# EAGLE board krokomerSTMa (EAGLE 9.6.2)
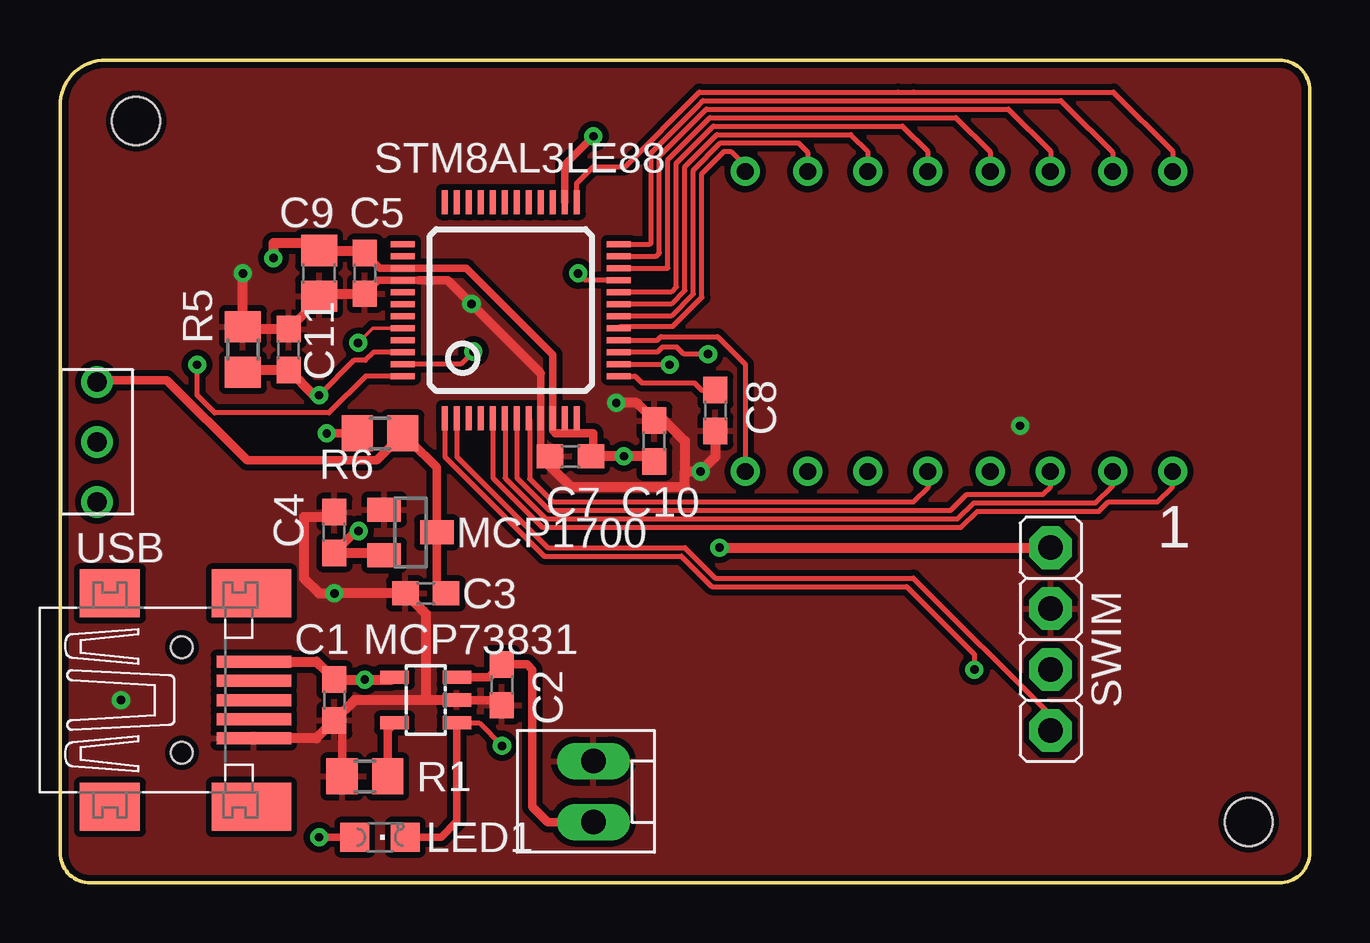
[diagram p0: board, top side]
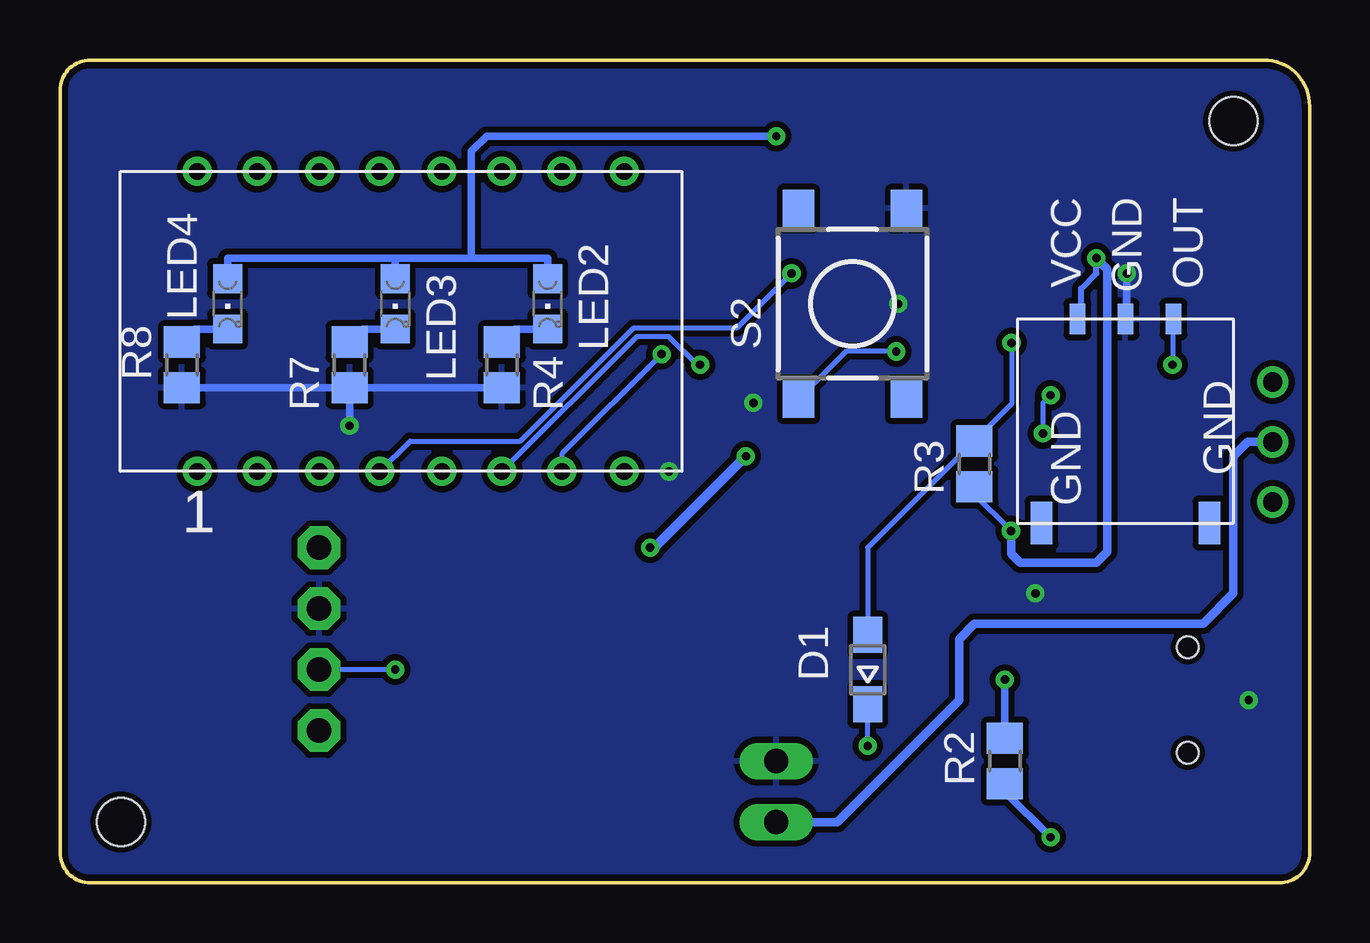
[diagram p1: board, bottom side, seen from below]

Size 52.07 x 34.29 mm. Coordinates in mm from the lower left corner, seen from the top.
Outline: 50.8,0 arc90 52.07,1.27 52.07,33.02 arc90 50.8,34.29 1.91,34.29 arc90 0,32.38 0,1.27 arc90 1.27,0 50.8,0
Copper layers (1*16): Top 0.035mm / dielectric 1.5mm / Bottom 0.035mm
Design rules "default *": minimum track width 5mil, minimum drill 0.3mm, track to track 6mil, track to pad 0.2mm, pad to pad 6mil, via to via 10mil, smd to smd 6mil, copper to edge 0.2mm, drill to drill 0.2mm, minimum pad ring 10mil, minimum via ring 8mil, stop-mask expansion 4mil, vias tented up to drill 0mil, thermal gap 10mil
Holes 2 mm at 49.53,2.54 3.17,31.75

## Footprints (pad centres in the part's own frame; a part is rotated, then mirrored left to right if it is on the bottom)
PSH02-02P = drill 1.016 pad 1.422 long: 1 -1.27,0; 2 1.27,0
C0603 = smd 1.1 x 1: 1 -0.85,0; 2 0.85,0
C0805 = smd 1.3 x 1.5: 1 -0.95,0; 2 0.95,0
SOD323-W = smd 1.5 x 1.2: A 1.45,0; C -1.45,0
CHIPLED_0805 = smd 1.2 x 1.2: A 0,-1.05; C 0,1.05
SOT23 = smd 1 x 1.4: 1 -0.95,-1.1; 2 0.95,-1.1; 3 0,1.1
SOT23-5L = smd 0.55 x 1.2: 1 -0.95,-1.3; 2 0,-1.3; 3 0.95,-1.3; 4 0.95,1.3; 5 -0.95,1.3
R0805 = smd 1.3 x 1.5: 1 -0.95,0; 2 0.95,0
PREPINAC = drill 0.8: 1 0,1; 2 2.5,1; 3 5,1
DTSM-6 = smd 1.55 x 1.3: 1 -3.975,2.25; 2 3.975,2.25; 3 -3.975,-2.25; 4 3.975,-2.25
TQFP48 = smd 0.25 x 1: 1 -2.75,-4.5; 2 -2.25,-4.5; 3 -1.75,-4.5; 4 -1.25,-4.5; 5 -0.75,-4.5; 6 -0.25,-4.5; 7 0.25,-4.5; 8 0.75,-4.5; 9 1.25,-4.5; 10 1.75,-4.5; 11 2.25,-4.5; 12 2.75,-4.5; 25 2.75,4.5; 26 2.25,4.5; 27 1.75,4.5; 28 1.25,4.5; 29 0.75,4.5; 30 0.25,4.5; 31 -0.25,4.5; 32 -0.75,4.5; 33 -1.25,4.5; 34 -1.75,4.5; 35 -2.25,4.5; 36 -2.75,4.5 | smd 1 x 0.25: 13 4.5,-2.75; 14 4.5,-2.25; 15 4.5,-1.75; 16 4.5,-1.25; 17 4.5,-0.75; 18 4.5,-0.25; 19 4.5,0.25; 20 4.5,0.75; 21 4.5,1.25; 22 4.5,1.75; 23 4.5,2.25; 24 4.5,2.75; 37 -4.5,2.75; 38 -4.5,2.25; 39 -4.5,1.75; 40 -4.5,1.25; 41 -4.5,0.75; 42 -4.5,0.25; 43 -4.5,-0.25; 44 -4.5,-0.75; 45 -4.5,-1.25; 46 -4.5,-1.75; 47 -4.5,-2.25; 48 -4.5,-2.75
S1G4_JUM = drill 1.016 pad 1.778 octagon: 1 -3.81,0; 2 -1.27,0; 3 1.27,0; 4 3.81,0
LCD16 = drill 0.7: 1 0,0; 2 2.5,0; 3 5.1,0; 4 7.6,0; 5 10.2,0; 6 12.7,0; 7 15.2,0; 8 17.8,0; 9 17.8,12.5; 10 15.2,12.5; 11 12.7,12.5; 12 10.2,12.5; 13 7.6,12.5; 14 5.1,12.5; 15 2.5,12.5; 16 0,12.5
STP100M = smd 1.778 x 0.914: 1 8.5,-1; 2 8.5,-8 | smd 1.27 x 0.66: 3 0,-2.5; 4 0,-4.5; 5 0,-6.5
32005-301 = smd 3.1 x 0.5: 1 3,1.6; 2 3,0.8; 3 3,0; 4 3,-0.8; 5 3,-1.6 | smd 2.5 x 2: M1 -3,-4.45; M2 -3,4.45 | smd 3.3 x 2: M3 2.9,4.45; M4 2.9,-4.45 | hole 0.9: 0,2.2; 0,-2.2

## Placement (x,y rotation side)
BAT-KONEKTOR  [PSH02-02P]  22.23,3.81 270 top
C1  4.7uF  [C0603]  11.43,7.62 270 top
C2  4.7uF  [C0603]  18.41,8.26 270 top
C3  1uF  [C0603]  15.24,12.06 180 top
C4  1uF  [C0603]  11.43,14.61 90 top
C5  100nF  [C0603]  12.7,25.4 270 top
C7  100nF  [C0603]  21.27,17.78 180 top
C8  1uF  [C0603]  27.3,19.68 270 top
C9  10uF  [C0805]  10.79,25.4 90 top
C10  1uF  [C0603]  24.77,18.41 90 top
C11  10nF  [C0603]  9.53,22.23 90 top
D1  [SOD323-W]  18.41,8.89 90 bottom
LED1  [CHIPLED_0805]  13.34,1.91 270 top
LED2  [CHIPLED_0805]  31.75,24.13 180 bottom
LED3  [CHIPLED_0805]  38.1,24.13 180 bottom
LED4  [CHIPLED_0805]  45.09,24.13 180 bottom
MCP1700  MCP1700-3302  [SOT23]  14.61,14.61 270 top
MCP73831  MCP73831  [SOT23-5L]  15.24,7.62 90 top
R1  10K  [R0805]  12.7,4.45 180 top
R2  270R  [R0805]  12.7,5.08 270 bottom
R3  22K  [R0805]  13.97,17.46 90 bottom
R4  270R  [R0805]  33.66,21.59 90 bottom
R5  2M7  [R0805]  7.62,22.23 270 top
R6  1M5  [R0805]  13.34,18.73 0 top
R7  270R  [R0805]  40.01,21.59 90 bottom
R8  270R  [R0805]  46.99,21.59 90 bottom
S1  PREPINAC  [PREPINAC]  2.54,15.88 90 top
S2  TLACITKO  [DTSM-6]  19.05,24.13 90 bottom
STM8AL3LE88  STM8AL3LE  [TQFP48]  18.79,23.87 0 top
SWIM  S1G4_JUMP  [S1G4_JUM]  41.27,10.16 90 top
U$1  LCD16  [LCD16]  46.35,17.14 0 bottom
U$2  STP100M  [STP100M]  3.17,23.5 270 bottom
USB  USB  [32005-301]  5.08,7.62 0 top

## Library data of the parts
BAT-KONEKTOR SWIM = PaJa_konektory
C1-C5 C7-C11 = rcl; SPICEPREFIX: C
D1 = diode
LED1-LED4 = led
MCP1700 = v-reg
MCP73831 = microchip-update
R1-R8 = rcl; SPICEPREFIX: R
S1 = prepinac
S2 = switch-tact
STM8AL3LE88 = stm32
U$1 = LCD
U$2 = stp100m
USB = con-cypressindustries; OC_FARNELL: unknown; OC_NEWARK: unknown

## Nets
+3V3: C4.1 C5.1 C7.1 C9.2 C10.1 MCP1700.2 R3.1 STM8AL3LE88.10 STM8AL3LE88.11 STM8AL3LE88.12 STM8AL3LE88.39 SWIM.4 U$2.5
BCK: LED2.A LED3.A LED4.A STM8AL3LE88.26
COM1: STM8AL3LE88.5 U$1.1
COM2: STM8AL3LE88.6 U$1.2
COM3: STM8AL3LE88.7 U$1.3
COM4: STM8AL3LE88.21 U$1.4
DELIC: C11.1 R5.2 R6.1 STM8AL3LE88.46
GND: BAT-KONEKTOR.1 C1.2 C2.2 C3.2 C4.2 C5.2 C7.2 C8.2 C9.1 C10.2 C11.2 MCP1700.1 MCP73831.2 R1.2 R4.1 R5.1 R7.1 R8.1 S2.4 STM8AL3LE88.9 STM8AL3LE88.40 SWIM.3 U$2.4 USB.5
N$1: MCP73831.5 R1.1
N$2: LED1.A R2.2
N$3: D1.C LED1.C MCP73831.1
N$4: C8.1 STM8AL3LE88.13
N$5: STM8AL3LE88.2 SWIM.1
N$6: STM8AL3LE88.1 SWIM.2
N$7: S2.1 STM8AL3LE88.47
N$8: LED2.C R4.2
N$9: STM8AL3LE88.48 U$2.3
N$10: LED3.C R7.2
N$11: C3.1 MCP1700.3 R6.2 S1.3
N$12: LED4.C R8.2
N$28: C1.1 MCP73831.4 R2.1 USB.1
PC5: D1.A R3.2 STM8AL3LE88.44
SEG1: STM8AL3LE88.8 U$1.5
SEG2: STM8AL3LE88.14 U$1.6
SEG3: STM8AL3LE88.15 U$1.7
SEG4: STM8AL3LE88.16 U$1.8
SEG5: STM8AL3LE88.17 U$1.9
SEG6: STM8AL3LE88.18 U$1.10
SEG7: STM8AL3LE88.19 U$1.11
SEG8: STM8AL3LE88.20 U$1.12
SEG9: STM8AL3LE88.22 U$1.13
SEG10: STM8AL3LE88.23 U$1.14
SEG11: STM8AL3LE88.24 U$1.15
SEG12: STM8AL3LE88.25 U$1.16
VCC: BAT-KONEKTOR.2 C2.1 MCP73831.3 S1.2

## Tracks (layer width: path | path; a pad name or v marks a point on that pad's centre or on a via)
+3V3  (via drill 0.35)
  Top 0.2: 11.53,13.76 C4.1
  Top 0.254: C10.1 24.55,17.78 | 20.54,18.83 20.64,18.73 | C7.1 22.23,17.88 | STM8AL3LE88.11 21.04,18.81 20.95,18.73 | STM8AL3LE88.12 21.54,18.79 21.59,18.73 | 12.6,26.35 C5.1 | 10.47,26.67 C9.2
  Top 0.305: 20.54,18.83 STM8AL3LE88.10 20.54,22.01 16.93,25.62 STM8AL3LE88.39 13.33,25.62 C5.1 | 13.4,13.76 MCP1700.2
  Top 0.356: 20.64,18.73 20.95,18.73 21.59,18.73 22.23,18.73 22.23,17.88 | C4.1 12.34,14.67 v12.44,14.67
  Top 0.406: 24.55,17.78 v23.5,17.78 C7.1 | C9.2 12.6,26.35 | 10.47,26.67 8.89,26.67 v8.89,26.04 | v27.48,13.97 SWIM.4 | C4.1 13.4,13.76
  Bottom 0.2: v12.44,14.67 13.97,16.2 R3.1
  Bottom 0.254: U$2.5 9.53,23.64 9.53,24.77 8.89,25.4 v8.89,26.04 | 26.87,14.4 | 27.13,14.15 | 27.3,13.97 v27.48,13.97
  Bottom 0.356: v12.44,14.67 12.44,13.71 12.06,13.34 8.89,13.34 8.43,13.79 8.43,22.75 8.43,22.86 8.43,25.57 v8.89,26.04
  Bottom 0.406: v23.5,17.78 26.87,14.4 | 26.87,14.4 27.13,14.15 | 27.13,14.15 27.3,13.97
BCK  (via drill 0.35)
  Top 0.305: STM8AL3LE88.26 21.04,29.93 v22.23,31.11
  Bottom 0.305: v22.23,31.11 34.29,31.11 34.92,30.48 34.92,26.04 | 34.92,26.04 31.75,26.04 LED2.A | 34.92,26.04 38.1,26.04 | 38.1,26.04 LED3.A | 38.1,26.04 45.09,26.04 LED4.A
COM1
  Top 0.2: 18.11,16.8 20.1,14.82 37.54,14.82 38.21,15.49 43.29,15.49 43.68,15.88 45.72,15.88 46.35,16.51 U$1.1
  Top 0.203: STM8AL3LE88.5 18.04,16.88 18.11,16.8
COM2
  Top 0.2: STM8AL3LE88.6 18.55,19.35 18.55,16.86 20.24,15.17 37.4,15.17 38.06,15.84 43.15,15.84 43.85,16.55 U$1.2
COM3
  Top 0.2: U$1.3 41.27,17.12 41.27,16.51 40.96,16.19 37.78,16.19 37.11,15.52 20.39,15.52 19.04,16.88 STM8AL3LE88.7
COM4  (via drill 0.35)
  Top 0.203: STM8AL3LE88.21 21.87,25.12 v21.59,25.4
  Bottom 0.2: U$1.4 37.48,18.41 32.88,18.41 28.18,23.12 23.87,23.12 v21.59,25.4
DELIC  (via drill 0.35)
  Top 0.2: v10.79,20.32 12.24,21.77 12.73,21.77 13.07,22.12 STM8AL3LE88.46
  Top 0.203: R5.2 7.72,21.38
  Top 0.356: R6.1 v11.11,18.73
  Top 0.406: v10.79,20.32 10.58,20.32 C11.1 7.72,21.38
  Bottom 0.2: v11.11,18.73 11.11,20 v10.79,20.32
GND  (via drill 0.35)
  Top 0.2: C8.2 27.65,18.49
  Top 0.203: 10.79,24.34 C9.1 | R5.1 7.62,23.5 8.04,23.07
  Top 0.254: C7.2 20.04,18.17 | C10.2 25.18,19.27 | C9.1 10.79,24.55
  Top 0.305: 11.75,7.09 C1.2 | 18.2,7.62 C2.2 18.63,7.62 | 20.04,18.17 STM8AL3LE88.9 20.04,21.24 | C7.2 20.42,17.36 | C4.2 11.21,15.24 | STM8AL3LE88.40 13.97,25.12 | 13.97,25.12 13.27,25.12 C5.2 | 14.95,25.11 13.97,25.11 13.97,25.12
  Top 0.356: R1.2 11.75,7.09 | 18.2,7.62 MCP73831.2 | 20.04,21.24 v17.14,24.13 16.16,25.12 14.95,25.12 14.95,25.11 | C11.2 10.79,24.34
  Top 0.406: MCP73831.2 15.24,7.62 | 15.24,7.62 12.28,7.62 C1.2 10.68,6.02 USB.5 | C8.2 27.3,17.75 v26.7,17.14 26.04,17.14 | C10.2 24.03,20 v23.18,20 | 26.04,17.14 26.04,18.41 25.18,19.27 | 26.04,17.14 26.04,16.51 21.27,16.51 20.42,17.36 | 7.62,23.5 v7.62,25.4 | C11.2 8.04,23.07 | 11.21,15.24 10.16,15.24 10.16,12.7 10.79,12.06 v11.43,12.06 C3.2 15.24,11.21 15.24,7.62 | 10.79,24.55 C5.2
  Bottom 0.305: U$2.4 7.62,23.55 v7.62,25.4 | R7.1 v40.01,19.05 | R4.1 R7.1 | R7.1 R8.1
  other vias: 2.54,7.62
  pour Bottom (isolate 0.254): 0,1.27 arc90 1.27,0 50.8,0 arc90 52.07,1.27 52.07,3.81 52.07,33.02 arc90 50.8,34.29 1.91,34.29 arc90 0,32.38
  pour Top (isolate 0.254): 1.91,34.29 arc90 0,32.38 0,22.86 0,1.27 arc90 1.27,0 3.17,0 50.8,0 arc90 52.07,1.27 52.07,1.91 52.07,33.02 arc90 50.8,34.29 48.26,34.29
N$1
  Top 0.356: R1.1 13.65,6.38 MCP73831.5
N$2  (via drill 0.35)
  Top 0.305: LED1.A v10.79,1.91
  Bottom 0.203: 12.7,3.81 R2.2
  Bottom 0.305: v10.79,1.91 12.7,3.81
N$3  (via drill 0.35)
  Top 0.203: MCP73831.1 17.46,6.67 v18.41,5.71
  Top 0.305: LED1.C 15.88,1.91 16.54,2.57 MCP73831.1
  Bottom 0.203: v18.41,5.71 D1.C
N$4
  Top 0.2: STM8AL3LE88.13 23.97,21.12 24.25,20.84 26.43,20.84 26.74,20.54 C8.1
N$5
  Top 0.203: STM8AL3LE88.2 16.54,17.75 20.32,13.97 26.04,13.97 27.3,12.7 35.56,12.7 41.27,6.99 SWIM.1
N$6  (via drill 0.35)
  Top 0.2: 16.04,17.75 20.17,13.62 25.89,13.62 27.16,12.35 35.28,12.35 38.1,9.53 v38.1,8.89
  Top 0.203: STM8AL3LE88.1 16.04,17.75 16.11,17.67
  Bottom 0.203: v38.1,8.89 SWIM.2
N$7  (via drill 0.35)
  Top 0.2: v17.22,22.15 16.7,21.62 STM8AL3LE88.47
  Bottom 0.2: v17.22,22.15 19.31,22.15 S2.1
N$8
  Bottom 0.305: LED2.C 33.12,23.08 R4.2
N$9  (via drill 0.35)
  Top 0.2: STM8AL3LE88.48 12.74,21.12 11.21,19.59 6.45,19.59 5.71,20.32 v5.71,21.59
  Bottom 0.2: v5.71,21.59 5.67,21.63 U$2.3
N$10
  Bottom 0.305: LED3.C 39.47,23.08 R7.2
N$11
  Top 0.203: R6.2 14.6,18.41 14.61,18.41
  Top 0.356: C3.1 15.71,12.45 MCP1700.3 15.71,17.31 14.6,18.41 | R6.2 14.29,18.7 13.19,17.61 7.79,17.61 4.45,20.95 1.62,20.95 S1.3
N$12
  Bottom 0.305: LED4.C 46.45,23.08 R8.2
N$28  (via drill 0.35)
  Top 0.305: 13.84,8.47 MCP73831.4
  Top 0.406: 13.84,8.47 v12.7,8.47 C1.1 10.79,9.11 10.68,9.22 USB.1
  Bottom 0.305: R2.1 v12.7,8.47
PC5  (via drill 0.35)
  Top 0.152: v12.42,22.5 13.04,23.12 STM8AL3LE88.44
  Bottom 0.2: v12.42,22.5 12.42,19.96 R3.2 | D1.A 18.41,13.97 R3.2
  Bottom 0.203: 14.61,18.41 R3.2
SEG1
  Top 0.2: U$1.5 36.2,17.11 36.2,16.51 35.56,15.88 20.54,15.88 19.57,16.84 19.57,19.33 STM8AL3LE88.8
SEG2  (via drill 0.35)
  Top 0.2: STM8AL3LE88.14 25.37,21.62 v25.4,21.59
  Bottom 0.2: v25.4,21.59 25.52,21.59 26.7,22.77 28.04,22.77 U$1.6
SEG3  (via drill 0.35)
  Top 0.203: v27,22.03 26,22.03 25.7,22.32 25.1,22.32 24.89,22.12 STM8AL3LE88.15
  Bottom 0.2: v27,22.03 31.16,17.88 U$1.7
SEG4
  Top 0.2: STM8AL3LE88.16 24.89,22.62 25.04,22.77 27.4,22.77 28.55,21.61 U$1.8
SEG5
  Top 0.2: U$1.9 28.57,29.62 28.57,29.84 27.94,30.48 27.67,30.48 26.74,29.55 26.74,24.4 25.53,23.19 23.36,23.19 STM8AL3LE88.17
SEG6
  Top 0.2: STM8AL3LE88.18 25.46,23.62 26.39,24.54 26.39,29.7 27.52,30.83 30.76,30.83 31.16,30.44 U$1.10
SEG7
  Top 0.2: STM8AL3LE88.19 25.46,24.12 26.04,24.69 26.04,29.84 27.38,31.18 32.95,31.18 33.66,30.48 U$1.11
SEG8
  Top 0.2: U$1.12 36.16,30.48 35.1,31.54 27.23,31.54 25.68,29.99 25.68,24.84 25.46,24.62 STM8AL3LE88.20
SEG9
  Top 0.2: STM8AL3LE88.22 25.33,25.62 25.33,30.14 27.08,31.89 37.33,31.89 38.76,30.46 U$1.13
SEG10
  Top 0.2: STM8AL3LE88.23 24.85,26.12 24.98,26.25 24.98,30.28 26.94,32.24 39.51,32.24 41.27,30.48 41.27,29.66 U$1.14
SEG11
  Top 0.2: U$1.15 43.85,30.44 41.91,32.38 41.77,32.52 41.7,32.59 26.79,32.59 26.72,32.52 26.63,32.43 24.62,30.43 24.62,26.67 24.57,26.62 STM8AL3LE88.24
SEG12
  Top 0.2: U$1.16 46.35,30.48 43.89,32.95 35.56,32.95 34.92,32.95 26.64,32.95 23.54,29.84 22.23,29.84 21.54,29.16 STM8AL3LE88.25
VCC
  Top 0.356: MCP73831.3 17.88,8.57 C2.1 19.47,9.11 19.68,8.89 19.68,3.17 20.32,2.54 BAT-KONEKTOR.2
  Bottom 0.356: BAT-KONEKTOR.2 19.68,2.54 14.61,7.62 14.61,10.16 13.97,10.79 4.45,10.79 3.17,12.06 3.17,17.78 2.58,18.38 S1.2

## Text on the board
tNames: 1
bNames: 1